# Altium PCB MCU098_MSPM0G3507_PCB.PcbDoc (part 2 of 5)
Units mil, origin at the board's own origin, x right, y up, seen from the top; angles counter-clockwise.
Board outline 2310.03 x 4205.03 mil, 4 copper layers (Top Layer, VCC Layer, GND Layer, Bottom Layer), stack 62.4 mil thick; 260 components, 182 nets, 835 pads, 237 vias.
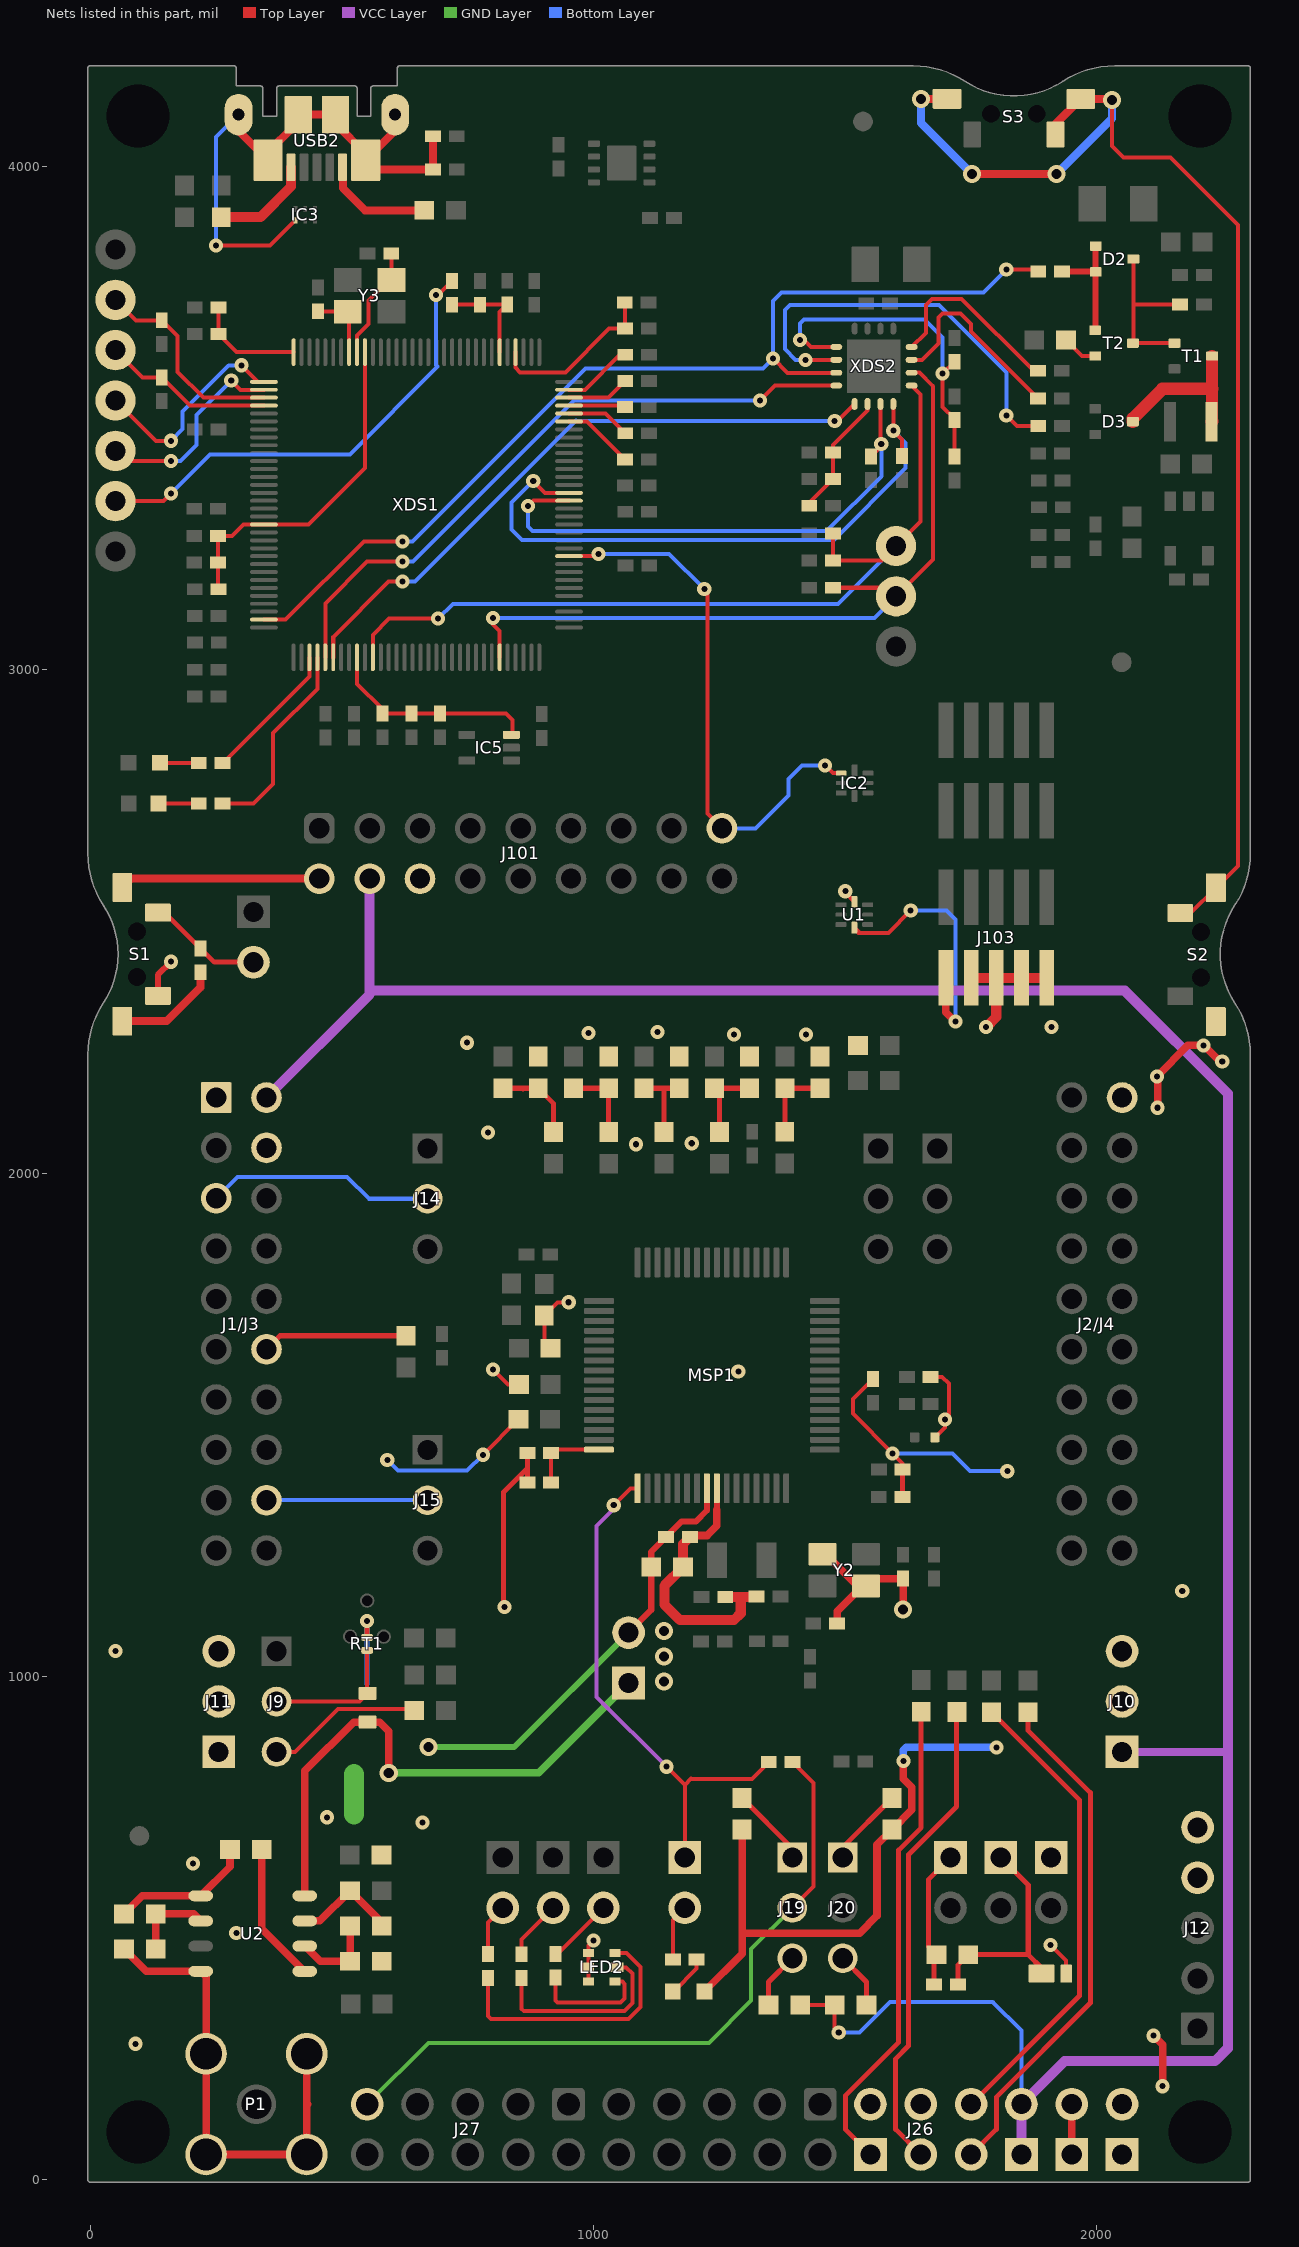
[diagram p4: the nets of this part, all layers, seen from the top]

## Part data
C1: library part CMP-0007304-1, "CAP, CERM, 10 uF, 6.3 V, +/- 20%, X5R, 0603", Cap_Case=0603, Manufacturer=MuRata, Supplier Part Number 1=490-7316-1-ND, TempCo=X5R, Tolerance_%=20%, Value1=Unknown, Value2=6.3V, ValueDisplayed=10uF, AEC Category=Q200, AEC Qualified=?, Cap_F=10µF, ComponentLink1Description="Datasheet link", ComponentLink1URL=http://search.murata.co.jp/Ceramy/image/img/A01X/G101/ENG/GRM188R60J106ME84-01.pdf, CompType=Capacitor, LatestRevisionDate=2017-03-09, MountType=SMT, PackageReference=0603, PartNumber=GRM188R60J106ME84, Polarized=N, Published=2008-06-19, Publisher="Texas Instruments", RoHS=Y, SizeArea_mm2=1.28, SizeAreaWB_mm2=4.68, SizeX_mm=1.6, SizeY_mm=0.8, SizeZ_mm=1, Supplier 1=Digi-Key, TaMax_C=85°C, TaMin_C=-55°C, Technology=Ceramic, U/M=EA, VDC_V=6.3V
C2: library part CMP-0006614-2, "CAP, CERM, 0.1 uF, 50 V, +/- 20%, X5R, 0402", Cap_Case=0402, Manufacturer=MuRata, Supplier Part Number 1=GRM155R61H104ME14D-ND, TempCo=X5R, Tolerance_%=20%, Value1=Unknown, Value2=50V, ValueDisplayed=0.1uF, AEC Category=Q200, AEC Grade=N/A, AEC Qualified=N, Cap_F=100nF, ComponentLink1Description="Datasheet link", ComponentLink1URL=http://search.murata.co.jp/Ceramy/image/img/A01X/G101/ENG/GRM155R61H104ME14-01.pdf, CompType=Capacitor, LatestRevisionDate=2017-03-09, MountType=SMT, PackageReference=0402, PartNumber=GRM155R61H104ME14D, Polarized=N, Published=2008-06-19, Publisher="Texas Instruments", RoHS=Y, SizeArea_mm2=0.5, SizeAreaWB_mm2=3, SizeX_mm=1, SizeY_mm=0.5, SizeZ_mm=0.6, Supplier 1=Digi-Key, Supplier 2=Mouser, Supplier Part Number 2=81-GRM155R61H104ME4D, TaMax_C=85°C, TaMin_C=-55°C, Technology=Ceramic, U/M=EA, VDC_V=50V
C3: library part CMP-0006551-2, "CAP, CERM, 0.47 uF, 6.3 V, +/- 10%, X5R, 0402", Cap_Case=0402, Manufacturer=MuRata, Supplier Part Number 1=490-3266-1-ND, TempCo=X5R, Tolerance_%=10%, Value1=Unknown, Value2=6.3V, ValueDisplayed=0.47uF, AEC Category=Q200, AEC Qualified=?, Cap_F=470nF, ComponentLink1Description="Datasheet link", ComponentLink1URL=http://search.murata.co.jp/Ceramy/PnsearchViewAction.do?HnOFG=ON&HnNFG=ON&SEL_CNT=50&sLang=en&sKey=GRM155R60J474KE19D&x=9&y=9&search=startwith, CompType=Capacitor, LatestRevisionDate=2017-03-09, MountType=SMT, PackageReference=0402, PartNumber=GRM155R60J474KE19D, Polarized=N, Published=2008-06-19, Publisher="Texas Instruments", RoHS=Y, SizeArea_mm2=0.5, SizeAreaWB_mm2=3, SizeX_mm=1, SizeY_mm=0.5, SizeZ_mm=0.6, Supplier 1=Digi-Key, Supplier 2=Newark, Supplier 3=Mouser, Supplier Part Number 2=38K1645, Supplier Part Number 3=81-GRM155R60J474KE9D, TaMax_C=85°C, TaMin_C=-55°C, Technology=Ceramic, U/M=EA, VDC_V=6.3V
C4: library part CMP-0006614-2, "CAP, CERM, 0.1 uF, 50 V, +/- 20%, X5R, 0402", Cap_Case=0402, Manufacturer=MuRata, Supplier Part Number 1=GRM155R61H104ME14D-ND, TempCo=X5R, Tolerance_%=20%, Value1=Unknown, Value2=50V, ValueDisplayed=DNC, AEC Category=Q200, AEC Grade=N/A, AEC Qualified=N, Cap_F=100nF, ComponentLink1Description="Datasheet link", ComponentLink1URL=http://search.murata.co.jp/Ceramy/image/img/A01X/G101/ENG/GRM155R61H104ME14-01.pdf, CompType=Capacitor, LatestRevisionDate=2017-03-09, MountType=SMT, PackageReference=0402, PartNumber=GRM155R61H104ME14D, Polarized=N, Published=2008-06-19, Publisher="Texas Instruments", RoHS=Y, SizeArea_mm2=0.5, SizeAreaWB_mm2=3, SizeX_mm=1, SizeY_mm=0.5, SizeZ_mm=0.6, Supplier 1=Digi-Key, Supplier 2=Mouser, Supplier Part Number 2=81-GRM155R61H104ME4D, TaMax_C=85°C, TaMin_C=-55°C, Technology=Ceramic, U/M=EA, VDC_V=50V
C5: library part CMP-0006388-2, "CAP, CERM, 47 pF, 25 V, +/- 5%, C0G/NP0, 0402", Cap_Case=0402, Manufacturer=MuRata, Supplier Part Number 1=81-GRM1555C1E470JA1D, TempCo=C0G/NP0, Tolerance_%=5%, Value1=Unknown, Value2=25V, ValueDisplayed=47pF, AEC Category=Q200, AEC Qualified=?, Cap_F=47pF, ComponentLink1Description="Datasheet link", ComponentLink1URL=http://search.murata.co.jp/Ceramy/PnsearchViewAction.do?HnOFG=ON&HnNFG=ON&SEL_CNT=50&sLang=en&sKey=GRM1555C1E470JA01D&x=9&y=9&search=startwith, CompType=Capacitor, LatestRevisionDate=2017-03-09, MountType=SMT, PackageReference=0402, PartNumber=GRM1555C1E470JA01D, Polarized=N, Published=2008-06-19, Publisher="Texas Instruments", RoHS=Y, SizeArea_mm2=0.5, SizeAreaWB_mm2=3, SizeX_mm=1, SizeY_mm=0.5, SizeZ_mm=0.6, Supplier 1=Mouser, TaMax_C=125°C, TaMin_C=-55°C, Technology=Ceramic, U/M=EA, VDC_V=25V
C6: library part CMP-0006590-2, "CAP, CERM, 0.01 uF, 16 V, +/- 10%, X5R, 0402", Cap_Case=0402, Manufacturer=MuRata, Supplier Part Number 1=GRM155R61C103KA01D-ND, TempCo=X5R, Tolerance_%=10%, Value1=Unknown, Value2=16V, ValueDisplayed=0.01uF, AEC Category=Q200, AEC Qualified=?, Cap_F=10nF, ComponentLink1Description="Datasheet link", ComponentLink1URL=http://search.murata.co.jp/Ceramy/PnsearchViewAction.do?HnOFG=ON&HnNFG=ON&SEL_CNT=50&sLang=en&sKey=GRM155R61C103KA01D&x=9&y=9&search=startwith, CompType=Capacitor, LatestRevisionDate=2017-03-09, MountType=SMT, PackageReference=0402, PartNumber=GRM155R61C103KA01D, Polarized=N, Published=2008-06-19, Publisher="Texas Instruments", RoHS=Y, SizeArea_mm2=0.5, SizeAreaWB_mm2=3, SizeX_mm=1, SizeY_mm=0.5, SizeZ_mm=0.6, Supplier 1=Digi-Key, Supplier 2=Mouser, Supplier Part Number 2=81-GRM155R61C103KA1D, TaMax_C=85°C, TaMin_C=-55°C, Technology=Ceramic, U/M=EA, VDC_V=16V
C7 C8: library part CMP-0007006-5, "CAP, CERM, 1 uF, 25 V, +/- 10%, X5R, 0603", Cap_Case=0603, Manufacturer=TDK, Supplier Part Number 1=445-5146-1-ND, TempCo=X5R, Tolerance_%=10%, Value1=Unknown, Value2=25V, ValueDisplayed=DNC, AEC Category=Q200, AEC Grade=N/A, AEC Qualified=N, Cap_F=1µF, ComponentLink1Description="Datasheet link", ComponentLink1URL=https://product.tdk.com/info/en/catalog/datasheets/mlcc_commercial_general_en.pdf, CompType=Capacitor, LatestRevisionDate=2017-03-09, MountType=SMT, PackageReference=0603, PartNumber=C1608X5R1E105K080AC, Polarized=N, Published=2008-06-19, Publisher="Texas Instruments", RoHS=Y, SizeArea_mm2=1.28, SizeAreaWB_mm2=4.68, SizeX_mm=1.6, SizeY_mm=0.8, SizeZ_mm=1, Supplier 1=Digi-Key, Supplier 2=Newark, Supplier 3=Mouser, Supplier Part Number 2=90R7677, Supplier Part Number 3=810-C1608X5R1E105K, TaMax_C=85°C, TaMin_C=-55°C, Technology=Ceramic, U/M=EA, VDC_V=25V
C9 C10 C11 C12: library part CMP-0006439-2, "CAP, CERM, 22 pF, 50 V, +/- 5%, C0G/NP0, 0402", Cap_Case=0402, Manufacturer=MuRata, Supplier Part Number 1=81-GRM1555C1H220JA1D, TempCo=C0G/NP0, Tolerance_%=5%, Value1=Unknown, Value2=50V, ValueDisplayed=22pF, AEC Category=Q200, AEC Qualified=?, Cap_F=22pF, ComponentLink1Description="Datasheet link", ComponentLink1URL=http://search.murata.co.jp/Ceramy/PnsearchViewAction.do?HnOFG=ON&HnNFG=ON&SEL_CNT=50&sLang=en&sKey=GRM1555C1H220JA01D&x=9&y=9&search=startwith, CompType=Capacitor, LatestRevisionDate=2017-03-09, MountType=SMT, PackageReference=0402, PartNumber=GRM1555C1H220JA01D, Polarized=N, Published=2008-06-19, Publisher="Texas Instruments", RoHS=Y, SizeArea_mm2=0.5, SizeAreaWB_mm2=3, SizeX_mm=1, SizeY_mm=0.5, SizeZ_mm=0.6, Supplier 1=Mouser, TaMax_C=125°C, TaMin_C=-55°C, Technology=Ceramic, U/M=EA
C13 C17 C18 C20 C24 C27 C28 C33 C38 C39 C44: library part CMP-0006623-2, "CAP, CERM, 0.1 uF, 6.3 V, +/- 10%, X7R, 0402", Cap_Case=0402, Manufacturer=MuRata, Supplier Part Number 1=GRM155R70J104KA01D-ND, TempCo=X7R, Tolerance_%=10%, Value1=Unknown, Value2=6.3V, ValueDisplayed=0.1uF, AEC Category=Q200, AEC Qualified=?, Cap_F=100nF, ComponentLink1Description="Datasheet link", ComponentLink1URL=http://search.murata.co.jp/Ceramy/PnsearchViewAction.do?HnOFG=ON&HnNFG=ON&SEL_CNT=50&sLang=en&sKey=GRM155R70J104KA01D&x=9&y=9&search=startwith, CompType=Capacitor, LatestRevisionDate=2017-03-09, MountType=SMT, PackageReference=0402, PartNumber=GRM155R70J104KA01D, Polarized=N, Published=2008-06-19, Publisher="Texas Instruments", RoHS=Y, SizeArea_mm2=0.5, SizeAreaWB_mm2=3, SizeX_mm=1, SizeY_mm=0.5, SizeZ_mm=0.6, Supplier 1=Digi-Key, Supplier 2=Mouser, Supplier Part Number 2=81-GRM155R70J104KA1D, TaMax_C=125°C, TaMin_C=-55°C, Technology=Ceramic, U/M=EA, VDC_V=6.3V
C14 C15 C16 C22 C26: library part CMP-0006658-2, "CAP, CERM, 0.01 uF, 25 V, +/- 10%, X7R, 0402", Cap_Case=0402, Manufacturer=MuRata, Supplier Part Number 1=490-1312-1-ND, TempCo=X7R, Tolerance_%=10%, Value1=Unknown, Value2=25V, ValueDisplayed=0.01uF, AEC Category=Q200, AEC Qualified=?, Cap_F=10nF, ComponentLink1Description="Datasheet link", ComponentLink1URL=http://search.murata.co.jp/Ceramy/PnsearchViewAction.do?HnOFG=ON&HnNFG=ON&SEL_CNT=50&sLang=en&sKey=GRM155R71E103KA01D&x=9&y=9&search=startwith, CompType=Capacitor, LatestRevisionDate=2017-03-09, MountType=SMT, PackageReference=0402, PartNumber=GRM155R71E103KA01D, Polarized=N, Published=2008-06-19, Publisher="Texas Instruments", RoHS=Y, SizeArea_mm2=0.5, SizeAreaWB_mm2=3, SizeX_mm=1, SizeY_mm=0.5, SizeZ_mm=0.6, Supplier 1=Digi-Key, Supplier 2=Mouser, Supplier 3=Farnell, Supplier Part Number 2=81-GRM36X103K25, Supplier Part Number 3=8819734, TaMax_C=125°C, TaMin_C=-55°C, Technology=Ceramic, U/M=EA, VDC_V=25V
C19 C21 C25 C55: library part CMP-0006276-2, "CAP, CERM, 1 uF, 25 V, +/- 10%, X5R, 0402", Cap_Case=0402, Manufacturer=TDK, Supplier Part Number 1=445-9066-1-ND, TempCo=X5R, Tolerance_%=10%, Value1=Unknown, Value2=25V, ValueDisplayed=1uF, AEC Category=Q200, AEC Grade=N/A, AEC Qualified=N, Cap_F=1µF, ComponentLink1Description="Datasheet link", ComponentLink1URL=https://product.tdk.com/info/en/catalog/datasheets/mlcc_commercial_general_en.pdf, CompType=Capacitor, LatestRevisionDate=2017-03-09, MountType=SMT, PackageReference=0402, PartNumber=C1005X5R1E105K050BC, Polarized=N, Published=2008-06-19, Publisher="Texas Instruments", RoHS=Y, SizeArea_mm2=0.5, SizeAreaWB_mm2=3, SizeX_mm=1, SizeY_mm=0.5, SizeZ_mm=0.6, Supplier 1=Digi-Key, Supplier 2=Newark, Supplier 3=Mouser, Supplier Part Number 2=07W9127, Supplier Part Number 3=810-C1005X5R1E105K, TaMax_C=80°C, TaMin_C=-55°C, Technology=Ceramic, U/M=EA, VDC_V=25V
C23 C56: library part CMP-0006543-2, "CAP, CERM, 2.2 uF, 6.3 V, +/- 10%, X5R, 0402", Cap_Case=0402, Manufacturer=MuRata, Supplier Part Number 1=81-GRM155R60J225KE5D, TempCo=X5R, Tolerance_%=10%, Value1=Unknown, Value2=6.3V, ValueDisplayed=2.2uF, AEC Category=Q200, AEC Grade=N/A, AEC Qualified=N, Cap_F=2.2µF, ComponentLink1Description="Datasheet link", ComponentLink1URL=http://psearch.en.murata.com/capacitor/product/GRM155R60J225KE95%23.pdf, CompType=Capacitor, LatestRevisionDate=2017-03-09, MountType=SMT, PackageReference=0402, PartNumber=GRM155R60J225KE95D, Polarized=N, Published=2008-06-19, Publisher="Texas Instruments", RoHS=Y, SizeArea_mm2=0.5, SizeAreaWB_mm2=3, SizeX_mm=1, SizeY_mm=0.5, SizeZ_mm=0.6, Supplier 1=Mouser, TaMax_C=85°C, TaMin_C=-55°C, Technology=Ceramic, U/M=EA, VDC_V=6.3V
C29 C30: library part CMP-0006415-2, "CAP, CERM, 12 pF, 50 V, +/- 5%, C0G/NP0, 0402", Cap_Case=0402, Manufacturer=MuRata, Supplier Part Number 1=14T3292, TempCo=C0G/NP0, Tolerance_%=5%, Value1=Unknown, Value2=50V, ValueDisplayed=12pF, AEC Category=Q200, AEC Qualified=?, Cap_F=12pF, ComponentLink1Description="Datasheet link", ComponentLink1URL=http://search.murata.co.jp/Ceramy/PnsearchViewAction.do?HnOFG=ON&HnNFG=ON&SEL_CNT=50&sLang=en&sKey=GRM1555C1H120JA01D&x=9&y=9&search=startwith, CompType=Capacitor, LatestRevisionDate=2017-03-09, MountType=SMT, PackageReference=0402, PartNumber=GRM1555C1H120JA01D, Polarized=N, Published=2008-06-19, Publisher="Texas Instruments", RoHS=Y, SizeArea_mm2=0.5, SizeAreaWB_mm2=3, SizeX_mm=1, SizeY_mm=0.5, SizeZ_mm=0.6, Supplier 1=Newark, Supplier 2=Mouser, Supplier 3=Farnell, Supplier Part Number 2=81-GRM1555C1H120JA1D, Supplier Part Number 3=1828875, TaMax_C=125°C, TaMin_C=-55°C, Technology=Ceramic, U/M=EA, VDC_V=50V
C31 C34: library part CMP-0006454-1, "CAP, CERM, 33 pF, 50 V, +/- 5%, C0G/NP0, 0402", Cap_Case=0402, Manufacturer=MuRata, Supplier Part Number 1=81-GRM1555C1H330JA1D, TempCo=C0G/NP0, Tolerance_%=5%, Value1=Unknown, Value2=50V, ValueDisplayed=33pF, AEC Category=Q200, AEC Qualified=?, Cap_F=33pF, ComponentLink1Description="Datasheet link", ComponentLink1URL=http://search.murata.co.jp/Ceramy/PnsearchViewAction.do?HnOFG=ON&HnNFG=ON&SEL_CNT=50&sLang=en&sKey=GRM1555C1H330JA01D&x=9&y=9&search=startwith, CompType=Capacitor, LatestRevisionDate=2017-03-09, MountType=SMT, PackageReference=0402, PartNumber=GRM1555C1H330JA01D, Polarized=N, Published=2008-06-19, Publisher="Texas Instruments", RoHS=Y, SizeArea_mm2=0.5, SizeAreaWB_mm2=3, SizeX_mm=1, SizeY_mm=0.5, SizeZ_mm=0.6, Supplier 1=Mouser, TaMax_C=125°C, TaMin_C=-55°C, Technology=Ceramic, U/M=EA, VDC_V=50V
C32 C36: library part CMP-0011480-1, "CAP, TA, 4.7 uF, 16 V, +/- 10%, 4 ohm, SMD", Cap_Case=3216-18, Manufacturer=AVX, Supplier Part Number 1=478-3868-1-ND, Tolerance_%=10%, Value1="4 ohm", Value2=16V, ValueDisplayed=4.7uF, AEC Category=Q200, AEC Grade=N/A, AEC Qualified=N, Cap_F=4.7µF, ComponentLink1Description="Datasheet link", ComponentLink1URL=http://www.avx.com/docs/Catalogs/taj.pdf, CompType=Capacitor, ESR_ohm=4, LatestRevisionDate=2017-03-09, LatestRevisionNote="Updated supplier links", MountType=SMT, PackageReference=3216-18, PartNumber=TAJA475K016RNJ, Polarized=Y, Publisher="Texas Instruments", RoHS=Y, Series=TAJ, SizeArea_mm2=5.12, SizeAreaWB_mm2=10.92, SizeX_mm=3.2, SizeY_mm=1.6, SizeZ_mm=1.8, Supplier 1=Digi-Key, Supplier 2=Newark, Supplier 3=Mouser, Supplier Part Number 2=60R5857, Supplier Part Number 3=581-TAJA475K016R, TaMax_C=125°C, TaMin_C=-55°C, Technology=TA, U/M=EA, VDC_V=16V
C35: library part CMP-0006354-2, "CAP, CERM, 1000 pF, 50 V, +/- 10%, X7R, AEC-Q200 Grade 1, 0402", Cap_Case=0402, Manufacturer=MuRata, Supplier Part Number 1=490-4761-1-ND, TempCo=X7R, Tolerance_%=10%, Value1=Unknown, Value2=50V, ValueDisplayed=1000pF, AEC Category=Q200, AEC Grade=1, AEC Qualified=Y, Cap_F=1nF, ComponentLink1Description="Datasheet link", ComponentLink1URL=http://psearch.en.murata.com/capacitor/product/GCM155R71H102KA37%23.pdf, CompType=Capacitor, LatestRevisionDate=2017-03-09, MountType=SMT, PackageReference=0402, PartNumber=GCM155R71H102KA37D, Polarized=N, Published=2008-06-19, Publisher="Texas Instruments", RoHS=Y, SizeArea_mm2=0.5, SizeAreaWB_mm2=3, SizeX_mm=1, SizeY_mm=0.5, SizeZ_mm=0.6, Supplier 1=Digi-Key, Supplier 2=Newark, Supplier 3=Mouser, Supplier Part Number 2=45Y5158, Supplier Part Number 3=81-GCM155R71H102KA7D, TaMax_C=125°C, TaMin_C=-55°C, Technology=Ceramic, U/M=EA, VDC_V=50V
C37 C43: library part CMP-0007341-4, "CAP, CERM, 4.7 uF, 16 V, +/- 10%, X5R, 0603", Cap_Case=0603, Manufacturer=MuRata, Supplier Part Number 1=490-10481-1-ND, TempCo=X5R, Tolerance_%=10%, Value1=Unknown, Value2=16V, ValueDisplayed=4.7uF, AEC Category=Q200, AEC Grade=N/A, AEC Qualified=N, Cap_F=4.7µF, ComponentLink1Description="Datasheet link", ComponentLink1URL=http://psearch.murata.com/capacitor/product/GRM188R61C475KAAJ%23.pdf, CompType=Capacitor, LatestRevisionDate=2017-03-09, MountType=SMT, PackageReference=0603, PartNumber=GRM188R61C475KAAJ, Polarized=N, Published=2008-06-19, Publisher="Texas Instruments", RoHS=Y, SizeArea_mm2=1.28, SizeAreaWB_mm2=4.68, SizeX_mm=1.6, SizeY_mm=0.8, SizeZ_mm=1, Supplier 1=Digi-Key, Supplier 2=Mouser, Supplier Part Number 2=81-GRM188R61C475KAJD, TaMax_C=85°C, TaMin_C=-55°C, Technology=Ceramic, U/M=EA, VDC_V=16V
C40: library part CMP-0007313-1, "CAP, CERM, 47 uF, 6.3 V, +/- 20%, X5R, 0603", Cap_Case=0603, Manufacturer=MuRata, TempCo=X5R, Tolerance_%=20%, Value1=Unknown, Value2=6.3V, ValueDisplayed=47uF, AEC Category=Q200, AEC Qualified=?, Cap_F=47µF, ComponentLink1Description="Datasheet link", ComponentLink1URL=http://psearch.en.murata.com/capacitor/product/GRM188R60J476ME15%23.pdf, CompType=Capacitor, LatestRevisionDate=2017-03-09, MountType=SMT, PackageReference=0603, PartNumber=GRM188R60J476ME15D, Polarized=N, Published=2008-06-19, Publisher="Texas Instruments", RoHS=Y, SizeArea_mm2=1.28, SizeAreaWB_mm2=4.68, SizeX_mm=1.6, SizeY_mm=0.8, SizeZ_mm=1, TaMax_C=85°C, TaMin_C=-55°C, Technology=Ceramic, U/M=EA, VDC_V=6.3V
C41 C42: library part CMP-0006648-1, "CAP, CERM, 0.22 uF, 16 V, +/- 10%, X7R, 0402", Cap_Case=0402, Manufacturer=MuRata, Supplier Part Number 1=490-5418-1-ND, TempCo=X7R, Tolerance_%=10%, Value1=Unknown, Value2=16V, ValueDisplayed=0.22uF, AEC Category=Q200, AEC Qualified=?, Cap_F=220nF, ComponentLink1Description="Datasheet link", ComponentLink1URL=http://search.murata.co.jp/Ceramy/PnsearchViewAction.do?HnOFG=ON&HnNFG=ON&SEL_CNT=50&sLang=en&sKey=GRM155R71C224KA12D&x=9&y=9&search=startwith, CompType=Capacitor, LatestRevisionDate=2017-03-09, MountType=SMT, PackageReference=0402, PartNumber=GRM155R71C224KA12D, Polarized=N, Published=2008-06-19, Publisher="Texas Instruments", RoHS=Y, SizeArea_mm2=0.5, SizeAreaWB_mm2=3, SizeX_mm=1, SizeY_mm=0.5, SizeZ_mm=0.6, Supplier 1=Digi-Key, Supplier 2=Mouser, Supplier Part Number 2=81-GRM155R71C224KA2D, TaMax_C=125°C, TaMin_C=-55°C, Technology=Ceramic, U/M=EA, VDC_V=16V
C45 C46 C48 C49 C50 C51 C52 C53: library part CMP-0006906-5, "CAP, CERM, 2.2 uF, 10 V, +/- 10%, X5R, 0603", Cap_Case=0603, Manufacturer=Kemet, Supplier Part Number 1=399-4911-1-ND, TempCo=X5R, Tolerance_%=10%, Value1=Unknown, Value2=10V, ValueDisplayed=2.2uF, AEC Category=Q200, AEC Qualified=?, Cap_F=2.2µF, ComponentLink1Description="Datasheet link", ComponentLink1URL=http://www.kemet.com/kemet/web/homepage/kechome.nsf/vapubfiles/F3102_Y5V.pdf/$file/F3102_Y5V.pdf, CompType=Capacitor, LatestRevisionDate=2017-03-09, MountType=SMT, PackageReference=0603, PartNumber=C0603C225K8PACTU, Polarized=N, Published=2008-06-19, Publisher="Texas Instruments", RoHS=Y, SizeArea_mm2=1.28, SizeAreaWB_mm2=4.68, SizeX_mm=1.6, SizeY_mm=0.8, SizeZ_mm=1, Supplier 1=Digi-Key, Supplier 2=Mouser, Supplier 3=Farnell, Supplier Part Number 2=80-C0603C225K8P, Supplier Part Number 3=1108322, TaMax_C=85°C, TaMin_C=-55°C, Technology=Ceramic, U/M=EA, VDC_V=10V
C47: library part CMP-0006970-1, "CAP, CERM, 82 pF, 50 V, +/- 10%, C0G/NP0, 0603", Cap_Case=0603, Manufacturer=Kemet, Supplier Part Number 1=399-1059-1-ND, TempCo=C0G/NP0, Tolerance_%=10%, Value1=Unknown, Value2=50V, ValueDisplayed=82pF, AEC Category=Q200, AEC Qualified=?, Cap_F=82pF, ComponentLink1Description="Datasheet link", ComponentLink1URL=http://www.kemet.com/kemet/web/homepage/kechome.nsf/vapubfiles/F3102_Y5V.pdf/$file/F3102_Y5V.pdf, CompType=Capacitor, LatestRevisionDate=2017-03-09, MountType=SMT, PackageReference=0603, PartNumber=C0603C820K5GACTU, Polarized=N, Published=2008-06-19, Publisher="Texas Instruments", RoHS=Y, SizeArea_mm2=1.28, SizeAreaWB_mm2=4.68, SizeX_mm=1.6, SizeY_mm=0.8, SizeZ_mm=1, Supplier 1=Digi-Key, Supplier 2=Mouser, Supplier Part Number 2=80-C0603C820K5G, TaMax_C=125°C, TaMin_C=-55°C, Technology=Ceramic, U/M=EA, VDC_V=50V
C54: library part CMP-0006688-2, "CAP, CERM, 3300 pF, 50 V, +/- 10%, X7R, 0402", Cap_Case=0402, Manufacturer=MuRata, Supplier Part Number 1=490-3248-1-ND, TempCo=X7R, Tolerance_%=10%, Value1=Unknown, Value2=50V, ValueDisplayed=3300pF, AEC Category=Q200, AEC Qualified=?, Cap_F=3.3nF, ComponentLink1Description="Datasheet link", ComponentLink1URL=http://search.murata.co.jp/Ceramy/PnsearchViewAction.do?HnOFG=ON&HnNFG=ON&SEL_CNT=50&sLang=en&sKey=GRM155R71H332KA01D&x=9&y=9&search=startwith, CompType=Capacitor, LatestRevisionDate=2017-03-09, MountType=SMT, PackageReference=0402, PartNumber=GRM155R71H332KA01D, Polarized=N, Published=2008-06-19, Publisher="Texas Instruments", RoHS=Y, SizeArea_mm2=0.5, SizeAreaWB_mm2=3, SizeX_mm=1, SizeY_mm=0.5, SizeZ_mm=0.6, Supplier 1=Digi-Key, Supplier 2=Mouser, Supplier Part Number 2=81-GRM36X332K50, TaMax_C=125°C, TaMin_C=-55°C, Technology=Ceramic, U/M=EA, VDC_V=50V
D1: library part CMP-0093192-1, "Photodiode PIN Chip 910nm Automotive 2-Pin Case 0805(2012Metric) T/R", Dark Current=0.001uA, Digikey Part Number=751-VEMD4110X01CT-ND, Forward Current=50mA, Manufacturer=Vishay, Mouser Part Number=78-VEMD4110X01, Operating Temperature Range="-40°C to +110°C", Reverse Breakdown Voltage=20V, AEC Grade="Grade 2", AEC Qualified=Yes, Angle=110°, ComponentLink1Description=Datasheet, ComponentLink1URL=https://www.vishay.com/docs/84910/vemd4110x01.pdf, datasheet=https://www.vishay.com/docs/84910/vemd4110x01.pdf, Datasheet Path=datasheets/Diode-VEMD4110X01.pdf, Digikey Description="PHOTO PIN DIODE IN LOW PROFILE 0", helpURL=https://upverter.com/upn/revision/01c27b98662013f0/, LambdaD=910nm, Lead Free=Yes, PackageReference=0805, Part Number=VEMD4110X01, PartNumber=VEMD4110X01, RoHS=TRUE, Sensor Output=Photodiode, SizeZ_mm=0.8mm, TaMax_C=+110°C, TaMin_C=-40°C, Vf_V=1.1V
D2 D3: library part CMP-0028883-1, "Diode, Schottky, 40 V, 0.12 A, AEC-Q101, SOT-323", Manufacturer=Nexperia, Supplier Part Number 1=568-7982-1-ND, Value1=0.12A, Value2=1V, AEC Category=Q101, AEC Qualified=Y, ComponentLink1Description="Datasheet link", ComponentLink1URL=http://www.nexperia.com/documents/data_sheet/BAS40_1PSXXSB4X_SER.pdf, CompType=Diode, Green_EU RoHS=Incomplete, Green_EU RoHS-2=Incomplete, Green_Lifecycle="Not Set", Green_REACh=Incomplete, Io_A=120mA, LatestRevisionDate=2017-05-08, MountType=SMT, PackageReference=SOT-323, PartNumber=BAS40-05W,115, Published=2008-06-26, Publisher="Texas Instruments", RoHS=Y, SizeArea_mm2=4.84, SizeAreaWB_mm2=10.24, SizeX_mm=2.2, SizeY_mm=2.2, SizeZ_mm=1.1, Supplier 1=Digi-Key, Supplier 2=Newark, Supplier 3=Mouser, Supplier Part Number 2=70R1987, Supplier Part Number 3=771-BAS40-05W115, TJmax_C=150°C, Type=Schottky, U/M=EA, Vf_V=1V, Vr_V=40V
FID1 FID2 FID3: library part CMP-0077181-1, "Fiducial mark.  There is nothing to buy or mount.", Manufacturer=N/A, ClassName=FiducialMark, CompType=Fiducial, MountType=N/A, PackageReference=N/A, PartNumber=N/A
H1 H2: library part CMP-0077978-1, "Spacer Support, Nylon 66", Manufacturer="Kang Yang", ComponentLink1Description="Datasheet Link", ComponentLink1URL=https://sps16.itg.ti.com/sites/KMS/crossdivteams/altium/docs/ComponentDatasheets/1104004000018---MAE-10.pdf, CompType=Standoff, Key=MAE-10, MountType=N/A, PackageReference="Spacer Nylon Support", PartNumber=MAE-10, RoHS=Y
IC1: library part CMP-0074212-1, "2.7-4V Dual In/Single Out MOSFET, 0.5A Main/0.1A Aux Input, Act-Low Enable, Comm. Temp., DBV0005A (SOT-23-5)", Alternate Manufacturer="Texas Instruments", Alternate PartNumber=TPS2102DBVT, ComponentLink1Description="Datasheet Link", ComponentLink1URL=http://www.ti.com/lit/ds/symlink/tps2102.pdf, CompType=IC, Footprint Path 6=C:\AltiumLibraries\Footprints\TI\.PcbLib, LatestRevisionDate=2017-06-09, Manufacturer="Texas Instruments", MountType=SMT, PackageDescription=SOT-23-5, PackageReference=DBV0005A, PartNumber=TPS2102DBVR, Publisher="Texas Instruments", RoHS=Y, SizeArea_mm2=8.12, SizeAreaWB_mm2=14.82, SizeX_mm=2.8, SizeY_mm=2.9, SizeZ_mm=1.45, U/M=EA
IC2 U1: library part CMP-0043125-2, "Low-Capacitance + / - 15 kV ESD Protection Array for High-Speed Data Interfaces, 6 Channels, -40 to +85 degC, 8-pin UQFN (RSE), Green (RoHS & no Sb/Br)", Breakdown Voltage(Min)(V)=6, IO Capacitance(Typ)(pF)=1.6, IO Leakage Current(nA)=1, Manufacturer="Texas Instruments", 1394 / Firewire=TRUE, ComponentLink1Description="Manufacturer URL", ComponentLink1URL=http://www.ti.com/, ComponentLink2Description=Datasheet, ComponentLink2URL=http://www.ti.com/general/docs/lit/getliterature.tsp?genericPartNumber=TPD6E004&fileType=pdf, ComponentLink3Description="URL Link1", ComponentLink3URL=SamplesURL:http://www.ti.com/product/tpd6e004#samples, DatasheetVersion=SLLS799A, Eco-Plan="Green (RoHS & no Sb/Br)", IEC 61000-4-2 Air-Gap(+/- kV)=12, IEC 61000-4-2 Contact(+/- kV)=8, Mounting Technology="Surface Mount", PackageDescription="8-Pin Plastic Quad Flatpack No-Lead, 1.5 x 1.5 mm Body, 0.5 mm Pitch", PackageReference=RSE0008A, PackageVersion="revD, Jan-2011", PartNumber=TPD6E004RSER, Serial ATA / eSATA=TRUE, SubFamily="ESD Solution", USB High Speed=TRUE
IC3: library part CMP-0043115-1, "ESD-Protection Array for High-Speed Data Interfaces, 4 Channels, -40 to +85 degC, 6-pin SON (DRY), Green (RoHS & no Sb/Br)", Breakdown Voltage(Min)(V)=6, IO Capacitance(Typ)(pF)=1.6, IO Leakage Current(nA)=1, Manufacturer="Texas Instruments", 1394 / Firewire=TRUE, ComponentLink1Description="Manufacturer URL", ComponentLink1URL=http://www.ti.com/, ComponentLink2Description=Datasheet, ComponentLink2URL=http://www.ti.com/general/docs/lit/getliterature.tsp?genericPartNumber=TPD4E004&fileType=pdf, ComponentLink3Description="URL Link1", ComponentLink3URL=SamplesURL:http://www.ti.com/product/tpd4e004#samples, DatasheetVersion=SLVS729A, Eco-Plan="Green (RoHS & no Sb/Br)", IEC 61000-4-2 Air-Gap(+/- kV)=12, IEC 61000-4-2 Contact(+/- kV)=8, Mounting Technology="Surface Mount", PackageDescription="6-Pin Plastic Small Outline No-Lead, 1 x 1.45 x 0.6 mm Body, 0.5 mm Pitch", PackageReference=DRY0006A, PackageVersion="revF, Dec-2011", PartNumber=TPD4E004DRYR, Serial ATA / eSATA=TRUE, SubFamily="ESD Solution", USB High Speed=TRUE
IC4: library part CMP-0036329-3, "500mA, Adjustable, Low Quiescent Current, Low-Noise, High-PSRR, Single-Output LDO Regulator, DRB0008A (VSON-8)", Manufacturer="Texas Instruments", Operating Temperature Range="-40 to 125 C", Rating=Catalog, Accuracy(%)=2, AEC Category=Q200, AEC Qualified=N, ComponentLink1Description="Datasheet Link", ComponentLink1URL=http://www.ti.com/lit/ds/symlink/tps735.pdf, ComponentLink2Description="Product Folder", ComponentLink2URL=http://www.ti.com/product/tps735, ComponentLink3Description="Online Datasheet", ComponentLink3URL=http://www.ti.com/product/tps735/datasheet, CompType=IC, Fixed Output Options(V)=3.3, Iout(Max)(A)=0.5, Iq(Typ)(mA)=0.04, MountType=SMT, PackageDescription=VSON-8, PackageReference=DRB0008A, PartNumber=TPS73533DRBT, RoHS=Y, SizeArea_mm2=9.0, SizeAreaWB_mm2=16.0, SizeX_mm=3.0, SizeY_mm=3.0, SizeZ_mm=1.0, Vdo(Typ)(mV)=280, Vin(Max)(V)=6.5, Vin(Min)(V)=2.7, Vout Adj(Max)(V)=3.3, Vout Adj(Min)(V)=3.3
IC5: library part CMP-0032790-2, "Precision Micropower Shunt Voltage Reference, 0.5% accuracy, 2.5 V, 15 ppm / degC, 15 mA, -40 to 85 degC, 5-pin SC70 (DCK), Green (RoHS & no Sb/Br)", Manufacturer="Texas Instruments", Rating=Catalog, Temp Coeff(Max)(ppm/ degree C)=100, Temp Coeff(Typ)(ppm/ degree C)=15, AEC Category=Q200, AEC Qualified=N, Code_JEDEC=MO-203, ComponentLink1Description="Datasheet Link", ComponentLink1URL=http://www.ti.com/lit/ds/symlink/lm4040.pdf, ComponentLink2Description="Product Folder", ComponentLink2URL=http://www.ti.com/product/lm4040, ComponentLink3Description="Online Datasheet", ComponentLink3URL=http://www.ti.com/product/lm4040/datasheet, CompType=IC, DatasheetVersion=SLOS456K, Eco-Plan="Green (RoHS & no Sb/Br)", Initial Accuracy @ 25/deg C(%)=0.5, Iout/Iz(Max)(mA)=15, Min Iz for Regulation(uA)=75, MountType=SMT, PackageDescription=SOT-SC70-5, PackageReference=DCK0005A, PartId=1, PartNumber=LM4040C25IDCKR, RoHS=Y, SizeArea_mm2=4.2, SizeAreaWB_mm2=9.3, SizeX_mm=2.1, SizeY_mm=2.0, SizeZ_mm=1.1, SubFamily="Shunt Voltage Reference", VO(V)=2.5
J1/J3: library part CMP-0003837-4, "Receptacle, 2.54mm, 10x2, Tin, TH", Alternate Manufacturer="Major League Electronics", Alternate PartNumber=CRD-081413-A-G, Manufacturer=Samtec, Supplier Part Number 1=SAM1204-10-ND, ComponentLink1Description="Datasheet Link", ComponentLink1URL=https://www.samtec.com/ftppub/cpdf/SSQ-1XX-XX-XXX-X-XX-XXX-XX-X-MKT.pdf, CompType=Receptacle, Green_EU RoHS=Passed, Green_EU RoHS-2=Passed, Green_Lifecycle=Active, Green_REACh=Incomplete, MountType=TH, Note="Booster Pack 40 pin J1 and J3", PackageReference="10x2 Receptacle", PartNumber=SSQ-110-03-T-D, RoHS=Y, Supplier 1=Digi-Key, Supplier 2=Newark, Supplier Part Number 2=11P8392
J2/J4: library part CMP-0078266-4, "Receptacle, 2.54mm, 10x2, Tin, TH", Alternate Manufacturer="Major League Electronics", Alternate PartNumber=CRD-081413-A-G, Manufacturer=Samtec, Supplier Part Number 1=SAM1204-10-ND, ComponentLink1Description="Datasheet Link", ComponentLink1URL=https://www.samtec.com/ftppub/cpdf/SSQ-1XX-XX-XXX-X-XX-XXX-XX-X-MKT.pdf, CompType=Receptacle, Green_EU RoHS=Passed, Green_EU RoHS-2=Passed, Green_Lifecycle=Active, Green_REACh=Incomplete, MountType=TH, Note="Booster Pack 40 pin J2 and J4", PackageReference="10x2 Receptacle", PartNumber=SSQ-110-03-T-D, RoHS=Y, Supplier 1=Digi-Key, Supplier 2=Newark, Supplier Part Number 2=11P8392
J4 J5 J6 J7 J8 J13 J16 J17 J18 J23 J24 J25: library part CMP-0055312-1, "Header, 100mil, 2x1, Tin, TH", Manufacturer=Molex, Supplier Part Number 1=WM8072-ND, ClassName=Header, CNHeader=TRUE, ComponentLink1Description="Datasheet URL", ComponentLink1URL=http://www.molex.com/pdm_docs/sd/901200122_sd.pdf, CompType=Header, CT=FALSE, Green_EU RoHS=Passed, Green_EU RoHS-2=Passed, Green_Lifecycle=Active, Green_REACh=Passed, LatestRevisionDate=26/05/2017, MountType=TH, PackageReference="Header 2x1", PartNumber=90120-0122, Publisher="Texas Instruments", RoHS=Y, Supplier 1=Digi-Key, Supplier 2=Newark, Supplier 3=Mouser, Supplier Part Number 2=19M8215, Supplier Part Number 3=538-90120-0122
J9 J10 J11 J14 J15 J19 J20 J21 J22: library part CMP-0002338-1, "Header, 100mil, 3x1, Tin, TH", Color=Black, Current_A=3A, Manufacturer="Sullins Connector Solutions", Supplier Part Number 1=S1012E-03-ND, Voltage_V=1.8kV, Cert_UL=Y, ClassName=Header, CNHeader=TRUE, ComponentLink1Description="Datasheet URL", ComponentLink1URL=http://www.sullinscorp.com/catalogs/77_PAGE108-109_.100_MALE_HDR.pdf, CompType=Header, ContactFinish=Tin, CT=FALSE, Gender=Male, Green_EU RoHS=Incomplete, Green_EU RoHS-2=Incomplete, Green_Lifecycle="Not Set", Green_REACh=Incomplete, LatestRevisionDate=26/05/2017, MountType=TH, Orientation=Vertical, PackageReference="Header, 3 PIN, 100mil, Tin", PartNumber=PEC03SAAN, PinCount=3, Pitch_mm=2.54, Publisher="Texas Instruments", RoHS=Y, Row_Count=1, Shrouded=N, Supplier 1=Digi-Key
J12: library part CMP-0075485-1, "Header, 100mil, 5x1, Gold, TH", Manufacturer=Samtec, Supplier Part Number 1=SAM8737-ND, ClassName=Header, CNHeader=True, ComponentLink1Description="Datasheet URL", ComponentLink1URL=http://www.samtec.com/ftppub/pdf/TSW_TH.PDF, CompType=Header, CT=False, Green_EU RoHS=Passed, Green_EU RoHS-2=Passed, Green_Lifecycle=Active, Green_REACh=Passed, LatestRevisionDate=2017-07-12, MountType=TH, PackageReference="Header, 100mil, 5x1, TH", PartNumber=HTSW-105-07-G-S, Publisher="Texas Instruments", RoHS=Y, Supplier 1=Digi-Key, Supplier 2=Newark, Supplier 3=Farnell, Supplier Part Number 2=60R3871, Supplier Part Number 3=1926325
J26: library part CMP-0054565-2, "Header, 100mil, 3x2, Gold, TH", Color=Black, Current_A=3A, Manufacturer="Sullins Connector Solutions", Supplier Part Number 1=S2011E-03-ND, Voltage_V=1.8kV, Cert_UL=Y, ClassName=Header, ComponentLink1Description="Datasheet URL", ComponentLink1URL=http://www.sullinscorp.com/catalogs/77_PAGE108-109_.100_MALE_HDR.pdf, CompType=Header, ContactFinish=Gold, Gender=Male, Green_EU RoHS=Passed, Green_EU RoHS-2=Passed, Green_Lifecycle=Active, Green_REACh=Passed, MountType=TH, Orientation=Vertical, PackageReference="Sullins 100mil, 2x3, 230 mil above insulator", PartNumber=PBC03DAAN, PinCount=6, Pitch_mm=2.54, RoHS=Y, Row_Count=2, RowSpacing_mm=2.54, Shrouded=N, Supplier 1=Digi-Key
J27 J28: library part CMP-0054806-2, "Header, 2.54 mm, 5x2, Gold, TH", Current_A=3A, Manufacturer="Wurth Elektronik", Supplier Part Number 1=732-2672-ND, Voltage_V=250V, Cert_UL=Y, ClassName=Header, ComponentLink1Description="Datasheet URL", ComponentLink1URL=http://katalog.we-online.de/em/datasheet/6130xx21121.pdf, CompType=Header, ContactFinish=Gold, Gender=Male, Green_EU RoHS=Passed, Green_EU RoHS-2=Incomplete, Green_Lifecycle=Active, Green_REACh=Passed, MountType=TH, Orientation=Vertical, PackageReference="Header, 2.54mm, 5x2, TH", PartNumber=61301021121, PinCount=10, Pitch_mm=2.54, RoHS=Y, Row_Count=2, RowSpacing_mm=2.54, Shrouded=N, Supplier 1=Digi-Key, Supplier 2=Newark, Supplier 3=Mouser, Supplier Part Number 2=16T0631, Supplier Part Number 3=710-61301021121
J101: library part CMP-0054622-1, "Header, 2.54mm, 9x2, Tin, TH", Color=Black, Current_A=3A, Manufacturer="Sullins Connector Solutions", Supplier Part Number 1=S2012E-09-ND, Cert_UL=Y, ClassName=Header, CNHeader=TRUE, ComponentLink1Description="Datasheet URL", ComponentLink1URL=http://www.sullinscorp.com/catalogs/77_PAGE108-109_.100_MALE_HDR.pdf, CompType=Header, ContactFinish=Tin, CT=FALSE, Gender=Male, LatestRevisionDate=26/05/2017, MountType=TH, Orientation=Vertical, PackageReference="Header, 2.54mm, 9x2, TH", PartNumber=PEC09DAAN, PinCount=18, Pitch_mm=2.54, Publisher="Texas Instruments", RoHS=Y, Row_Count=2, RowSpacing_mm=2.54, Shrouded=N, Supplier 1=Digi-Key
J102 J103: library part CMP-0075634-1, "Header(Shrouded), 1.27mm, 5x2, Gold, SMT", Color=Black, Current_A=3.3A, Manufacturer=Samtec, Supplier Part Number 1=SAM8799-ND, Cert_CSA=Y, Cert_UL=Y, CNHeader=False, ComponentLink1Description="Datasheet URL", ComponentLink1URL=http://suddendocs.samtec.com/prints/ftsh-1xx-xx-xxx-dv-xxx-mkt.pdf, CompType=Header, ContactFinish=Gold, CT=False, Gender=Male, LatestRevisionDate=2017-07-12, MountType=SMT, Orientation=Vertical, PackageReference="Header(Shrouded), 1.27mm, 5x2, SMT", PartNumber=FTSH-105-01-L-DV-K, PinCount=10, Pitch_mm=1.27, Publisher="Texas Instruments", RoHS=Y, Row_Count=2, RowSpacing_mm=1.27, Shrouded=Y, Supplier 1=Digi-Key, Supplier 2=Farnell, Supplier Part Number 2=1872577
L1: library part CMP-0059590-1, "Inductor, Wirewound, Ceramic, 2.2 uH, 0.89 A, 0.13 ohm, SMD", Manufacturer="Taiyo Yuden", Supplier Part Number 1=587-1618-1-ND, Value1="0.13 ohm", Value2=0.89A, ValueDisplayed=2.2uH, AEC Category=Q200, AEC Grade=N/A, AEC Qualified=N, ComponentLink1Description="Datasheet link", ComponentLink1URL=http://www.yuden.co.jp/productdata/catalog/en/wound02_e.pdf, CompType=Inductor, DCR_ohm=0.13, Green_EU RoHS=Passed, Green_EU RoHS-2=Passed, Green_Lifecycle=Active, Green_REACh=Passed, Imax_A=890mA, Ind_H=2.2µH, Irms="1.1A @ 40C rise", Isat="0.89A @ 30% inductance drop", LatestRevisionDate=2017-06-02, Material=Ceramic, MountType=SMT, PackageReference=2.5x1.8x1.8mm, PartNumber=CBC2518T2R2M, Published=2008-06-26, Publisher="Texas Instruments", RoHS=Y, SizeArea_mm2=4.5, SizeAreaWB_mm2=9.8, SizeX_mm=2.5, SizeY_mm=1.8, SizeZ_mm=1.8, Supplier 1=Digi-Key, Supplier 2=Newark, Supplier 3=Mouser, Supplier Part Number 2=18J0834, Supplier Part Number 3=963-CBC2518T2R2M, Technology=Wirewound
LED1 LED101: library part CMP-0002972-3, "LED, Red, SMD", Color=Red, Manufacturer="Stanley Electric Co., LTD", Power_TotalModule=57.5mW, Value1=0.0575W, Value2=1.7V, ComponentLink1Description="Datasheet link", ComponentLink1URL=https://sps06.itg.ti.com/sites/KMS/crossdivteams/altium/docs/ComponentDatasheets/BR1111C-TR.pdf, CompType=LED, Io_A=20mA, Ir_A=100µA, MountType=SMT, PackageReference=1.6x0.8mm, PartNumber=BR1111C-TR, RoHS=Y, TJmax_C=85°C, Type=?, Vf_V=1.7V, Vr_V=4V
LED2: library part CMP-0074720-1, "LED, RGB, SMD", Color=RGB, Manufacturer=Everlight, Supplier Part Number 1=19-337/R6GHBHC-A01/2T-ND, Value1=W, Value2=3.8V, Angle=120.0, ComponentLink1Description="Datasheet link", ComponentLink1URL=http://www.everlight.com/file/ProductFile/19-337-R6GHBHC-A01-2T.pdf, CompType=LED, Io_A=25mA, Ir_A=50µA, LatestRevisionDate=2017-06-26, MountType=SMT, PackageReference=1.6x1.6mm, PartNumber=19-337/R6GHBHC-A01/2T, Published=2008-07-11, Publisher="Texas Instruments", RoHS=Y, Supplier 1=Digi-Key, Supplier 2=Mouser, Supplier Part Number 2=638-19337R6GHBHCA01T, TJmax_C=85°C, Type=?, U/M=EA, Vf_V=3.8V, Vr_V=5V
LED102: library part CMP-0002827-3, "LED, Green, SMD", Color=green, Manufacturer=Lite-On, Power_TotalModule=100mW, Value1=0.1W, Value2=2.1V, ComponentLink1Description="Datasheet link", ComponentLink1URL=https://sps06.itg.ti.com/sites/KMS/crossdivteams/altium/docs/ComponentDatasheets/LTST-C190GKT.pdf, CompType=LED, Io_A=20mA, MountType=SMT, PackageReference=1.6x0.8x0.8mm, PartNumber=LTST-C190GKT, RoHS=Y, Type=?, Vf_V=2.1V
LOGO1: library part CMP-0074844-1, LatestRevisionDate=2017-07-06, Lib Reference="CE Mark", PartNumber="CE Mark", Published=2009-03-03, Publisher="Texas Instruments", SymbolCreator=a0412235
Logo2 Logo3: library part CMP-0074838-1, "Texas Instrument Corporate Signature", ClassName=Logo, LatestRevisionDate=2017-07-06, Lib Reference=TI_Logo, PartNumber="Texas Instruments", Published=2009-03-03, Publisher="Texas Instruments", SymbolCreator=a0412235, SymbolVersion=2011-08-22
Logo4: library part CMP-0074840-1, "ESD Susceptible Symbol", LatestRevisionDate=2017-07-06, Lib Reference=ESD_Susceptible, PartNumber="ESD Susceptible", Published=2009-03-03, Publisher="Texas Instruments", SymbolCreator=a0412235, SymbolVersion=2011-08-22
Logo6: library part CMP-0074847-1, "FCC_disclaimer", LatestRevisionDate=2017-07-06, Lib Reference=FCC_disclaimer, PartNumber="FCC disclaimer", Published=2009-03-03, Publisher="Texas Instruments"
Logo7: library part CMP-0074769-1, Lib Reference="WEEE logo", PartNumber="WEEE logo"
MH1 MH2 MH3 MH4: library part CMP-0078424-2, "PCB Mounting Hole, No Pad", Manufacturer=Any, PartNumber=N/A, CompType="Mounting Hole", Key="Mounting Hole (non-standard) No Pad", MountType=N/A, PackageReference="Mounting Hole"
MSP1: library part CMP-0093960-1, "Mixed-Signal Microcontrollers With CAN-FD Interface LQFP64", Frequency_Fixed=80MHz, Manufacturer="Texas Instruments", Max Supply Voltage=3.6V, Min Supply Voltage=1.62V, Operating Temperature Range="-40°C to +125°C", AEC Qualified=No, Core Architecture="ARM Cortex-M0+", Data Bus Width=32bits, Datasheet Path=datasheets/IC-MSPM0G3507SPM.pdf, helpURL=https://upverter.com/upn/revision/bc7c7c23c86c8513/, Interface=I2C,SPI,UART,CAN,LIN,IrDA,SMBus, Memory Size=128KBytes, Memory Type=FLASH, Number Of A/D Converters=2, Number Of Adc Channels=16, Number Of Cores=1, Number Of I2C Channels=2, Number Of I/Os=60, Number Of Pwm Channels=14, Number Of Spi Channels=2, Number Of Timers/Counters=7, Number Of Uart Channels=4, PackageReference=LQFP64, Part Number=MSPM0G3507SPM, PartNumber=MSPM0G3507SPM, Ram Size=32KBytes, RoHS=UNKNOWN, SizeZ_mm=1.6mm, Standoff Height=0.05mm, TaMax_C=+125°C, TaMin_C=-40°C, TJmax_C=+130°C
P1: library part CMP-0054990-1, "SMA Straight PCB Socket Die Cast, 50 Ohm, TH", Manufacturer="TE Connectivity", Supplier Part Number 1=A97594-ND, ValueDisplayed=DNC, CNHeader=FALSE, ComponentLink1Description="Datasheet URL", ComponentLink1URL=http://www.te.com/commerce/DocumentDelivery/DDEController?Action=srchrtrv&DocNm=1814832&DocType=Customer+Drawing&DocLang=English, CompType=SMA, CT=TRUE, Green_EU RoHS="Passed with Exemption", Green_EU RoHS-2=Incomplete, Green_Lifecycle=Active, Green_REACh=Passed, LatestRevisionDate=26/05/2017, MountType=TH, PackageReference="SMA Straight PCB Socket Die Cast, TH", PartNumber=5-1814832-1, Publisher="Texas Instruments", RoHS=Y, Supplier 1=Digi-Key, Supplier 2=Newark, Supplier 3=Mouser, Supplier Part Number 2=78M7270, Supplier Part Number 3=571-5-1814832-1
R1: library part CMP-0022292-1, "RES, 2.37 M, 1%, 0.1 W, 0603", Manufacturer=Vishay-Dale, Power_W=100mW, Supplier Part Number 1=541-2.37MHCT-ND, TempCo="100 ppm/C", Tolerance_%=1%, Value2=0.1W, Value_Code=2M37, ValueDisplayed=2.37M, AEC Category=Q200, AEC Qualified=?, ComponentLink1Description="Datasheet link", ComponentLink1URL=http://www.vishay.com/docs/20035/dcrcwe3.pdf, CompType=Resistor, EIA_Code=E96, LatestRevisionDate=2017-03-09, MountType=SMT, PackageReference=0603, PartNumber=CRCW06032M37FKEA, Published=2008-06-26, Publisher="Texas Instruments", Res_ohm=2.37M, RoHS=Y, SizeArea_mm2=1.28, SizeX_mm=1.6, SizeY_mm=0.8, SizeZ_mm=1, Supplier 1=Digi-Key, Supplier 2=Mouser, Supplier Part Number 2=71-CRCW06032M37FKEA, Technology="Thick Film", U/M=EA, Value1=1%, VDC_V=75V
R2 R14: library part CMP-0026935-1, "RES, 47 k, 5%, 0.063 W, 0402", Manufacturer=Vishay-Dale, Power_W=63mW, Supplier Part Number 1=541-47KJCT-ND, TempCo="200 ppm/C", Tolerance_%=5%, Value2=0.063W, Value_Code=47k0, ValueDisplayed=47k, AEC Category=Q200, AEC Qualified=?, ComponentLink1Description="Datasheet link", ComponentLink1URL=http://www.vishay.com/docs/20035/dcrcwe3.pdf, CompType=Resistor, EIA_Code=E24, LatestRevisionDate=2017-03-09, MountType=SMT, PackageReference=0402, PartNumber=CRCW040247K0JNED, Published=2008-06-26, Publisher="Texas Instruments", Res_ohm=47k, RoHS=Y, SizeArea_mm2=0.5, SizeX_mm=1, SizeY_mm=0.5, SizeZ_mm=0.6, Supplier 1=Digi-Key, Supplier 2=Newark, Supplier 3=Mouser, Supplier Part Number 2=52K7099, Supplier Part Number 3=71-CRCW0402-J-47K-E3, Technology="Thick Film", U/M=EA, Value1=5%, VDC_V=50V
R3 R61 R66 R67 R68 R70 R74: library part CMP-0025885-5, "RES, 0, 5%, 0.1 W, 0603", Manufacturer=Yageo, Power_W=100mW, Supplier Part Number 1=311-0.0GRCT-ND, TempCo="200 ppm/C", Tolerance_%=5%, Value2=0.1W, Value_Code=0000, ValueDisplayed=DNC, AEC Category=Q200, AEC Grade=N/A, AEC Qualified=N, ComponentLink1Description="Datasheet link", ComponentLink1URL=http://www.yageo.com/pdf/Pu-RC0603_51_PbFree_L_2.pdf, CompType=Resistor, EIA_Code=E24, MountType=SMT, PackageReference=0603, PartNumber=RC0603JR-070RL, Res_ohm=0, RoHS=Y, SizeArea_mm2=1.28, SizeAreaWB_mm2=4.68, SizeX_mm=1.6, SizeY_mm=0.8, SizeZ_mm=1, Supplier 1=Digi-Key, Supplier 2=Mouser, Supplier 3=Farnell, Supplier Part Number 2=603-RC0603JR-070RL, Supplier Part Number 3=9233130, Technology="Thick Film", Value1=5%, VDC_V=75V
R4 R29 R30: library part CMP-0026934-2, "RES, 470, 5%, 0.063 W, 0402", Manufacturer=Vishay-Dale, Power_W=63mW, Supplier Part Number 1=541-470JCT-ND, TempCo="200 ppm/C", Tolerance_%=5%, Value2=0.063W, Value_Code=470R, ValueDisplayed=470, AEC Category=Q200, AEC Qualified=?, ComponentLink1Description="Datasheet link", ComponentLink1URL=http://www.vishay.com/docs/20035/dcrcwe3.pdf, CompType=Resistor, EIA_Code=E24, LatestRevisionDate=2017-03-09, MountType=SMT, PackageReference=0402, PartNumber=CRCW0402470RJNED, Published=2008-06-26, Publisher="Texas Instruments", Res_ohm=470, RoHS=Y, SizeArea_mm2=0.5, SizeX_mm=1, SizeY_mm=0.5, SizeZ_mm=0.6, Supplier 1=Digi-Key, Supplier 2=Newark, Supplier 3=Mouser, Supplier Part Number 2=59M6737, Supplier Part Number 3=71-CRCW0402J-470-E3, Technology="Thick Film", U/M=EA, Value1=5%, VDC_V=50V
R5: library part CMP-0026878-1, "RES, 220, 5%, 0.063 W, 0402", Manufacturer=Vishay-Dale, Power_W=63mW, Supplier Part Number 1=541-220JCT-ND, TempCo="200 ppm/C", Tolerance_%=5%, Value2=0.063W, Value_Code=220R, ValueDisplayed=220, AEC Category=Q200, AEC Qualified=?, ComponentLink1Description="Datasheet link", ComponentLink1URL=http://www.vishay.com/docs/20035/dcrcwe3.pdf, CompType=Resistor, EIA_Code=E24, LatestRevisionDate=2017-03-09, MountType=SMT, PackageReference=0402, PartNumber=CRCW0402220RJNED, Published=2008-06-26, Publisher="Texas Instruments", Res_ohm=220, RoHS=Y, SizeArea_mm2=0.5, SizeX_mm=1, SizeY_mm=0.5, SizeZ_mm=0.6, Supplier 1=Digi-Key, Supplier 2=Newark, Supplier 3=Mouser, Supplier Part Number 2=59M6718, Supplier Part Number 3=71-CRCW0402J-220-E3, Technology="Thick Film", U/M=EA, Value1=5%, VDC_V=50V
R6 R7: library part CMP-0026906-1, "RES, 330, 5%, 0.063 W, 0402", Manufacturer=Vishay-Dale, Power_W=63mW, Supplier Part Number 1=541-330JCT-ND, TempCo="200 ppm/C", Tolerance_%=5%, Value2=0.063W, Value_Code=330R, ValueDisplayed=330, AEC Category=Q200, AEC Qualified=?, ComponentLink1Description="Datasheet link", ComponentLink1URL=http://www.vishay.com/docs/20035/dcrcwe3.pdf, CompType=Resistor, EIA_Code=E24, LatestRevisionDate=2017-03-09, MountType=SMT, PackageReference=0402, PartNumber=CRCW0402330RJNED, Published=2008-06-26, Publisher="Texas Instruments", Res_ohm=330, RoHS=Y, SizeArea_mm2=0.5, SizeX_mm=1, SizeY_mm=0.5, SizeZ_mm=0.6, Supplier 1=Digi-Key, Supplier 2=Newark, Supplier 3=Mouser, Supplier Part Number 2=59M6728, Supplier Part Number 3=71-CRCW0402J-330-E3, Technology="Thick Film", U/M=EA, Value1=5%, VDC_V=50V
R8: library part CMP-0088648-1, "Res Thin Film 0402 100K Ohm 0.1% 1/16W ±25ppm/°C Molded SMD SMD Punched Carrier T/R", Digikey Part Number=P100KDCCT-ND, Manufacturer=Panasonic, Mouser Part Number=667-ERA-2AEB104X, Octopart Part Number=aea26725a1f47165, Operating Temperature Range="-55°C to +155°C", Power_W=63mW, TempCo=25ppm/°C, Tolerance_%=0.1%, Voltage=25V, AEC Grade="Grade 0", AEC Qualified=Yes, Category 5A00970A6D5C81C7=Uncategorized, Category 5C6A91606D4187Ad=Resistors, Category 7542B8484461Ae85="Passive Components", Category Cd01000Bfc2916C6="Single Components", ComponentLink1Description=Datasheet, ComponentLink1URL=https://industrial.panasonic.com/cdbs/www-data/pdf/RDM0000/AOA0000C307.pdf, datasheet=https://industrial.panasonic.com/cdbs/www-data/pdf/RDM0000/AOA0000C307.pdf, Datasheet Path=datasheets/Res-ERA-2AEB104X.pdf, Digikey Description="RES SMD 100K OHM 0.1% 1/16W 0402", helpURL=https://upverter.com/upn/revision/e235bfb49dac4d4c/, Lead Free=Yes, Mouser Description="Res Thin Film 0402 100K Ohm 0.1% 0.063W ±25ppm/°C Molded SMD Punched Carrier T/R", PackageReference=0402, Part Number=ERA-2AEB104X, PartNumber=ERA-2AEB104X, Res_ohm=100k, RoHS=TRUE, Series=ERA, SizeZ_mm=0.4mm, Supplier 1=Digikey, Supplier 2=Mouser, Supplier Part Number 1=P100KDCCT-ND, Supplier Part Number 2=667-ERA-2AEB104X, Technology="Thin Film", VDC_V=50V
R9 R10 R11 R15 R17 R20 R22: library part CMP-0027004-2, "RES, 0, 5%, 0.063 W, 0402", Manufacturer="Yageo America", Power_W=63mW, Supplier Part Number 1=311-0.0JRCT-ND, TempCo="200 ppm/C", Tolerance_%=5%, Value2=0.063W, Value_Code=0000, ValueDisplayed=DNC, AEC Category=Q200, AEC Qualified=?, ComponentLink1Description="Datasheet link", ComponentLink1URL=http://www.yageo.com/pdf/Pu-RC0402_51_PbFree_L_2.pdf, CompType=Resistor, EIA_Code=E24, LatestRevisionDate=2017-03-09, MountType=SMT, PackageReference=0402, PartNumber=RC0402JR-070RL, Published=2008-06-26, Publisher="Texas Instruments", Res_ohm=0, RoHS=Y, SizeArea_mm2=0.5, SizeX_mm=1, SizeY_mm=0.5, SizeZ_mm=0.6, Supplier 1=Digi-Key, Supplier 2=Mouser, Supplier 3=Farnell, Supplier Part Number 2=603-RC0402JR-070RL, Supplier Part Number 3=9232516, Technology="Thick Film", U/M=EA, Value1=5%, VDC_V=50V
R12 R16: library part CMP-0025927-5, "RES, 4.7 k, 5%, 0.1 W, 0603", Manufacturer=Yageo, Power_W=100mW, Supplier Part Number 1=311-4.7KGRCT-ND, TempCo="100 ppm/C", Tolerance_%=5%, Value2=0.1W, Value_Code=4k70, ValueDisplayed=4.7k, AEC Category=Q200, AEC Grade=N/A, AEC Qualified=N, ComponentLink1Description="Datasheet link", ComponentLink1URL=http://www.yageo.com/pdf/Pu-RC0603_51_PbFree_L_2.pdf, CompType=Resistor, EIA_Code=E24, MountType=SMT, PackageReference=0603, PartNumber=RC0603JR-074K7L, Res_ohm=4.7k, RoHS=Y, SizeArea_mm2=1.28, SizeAreaWB_mm2=4.68, SizeX_mm=1.6, SizeY_mm=0.8, SizeZ_mm=1, Supplier 1=Digi-Key, Supplier 2=Mouser, Supplier 3=Farnell, Supplier Part Number 2=603-RC0603JR-074K7L, Supplier Part Number 3=9233466, Technology="Thick Film", Value1=5%, VDC_V=75V
R13 R19: library part CMP-0026886-1, "RES, 270, 5%, 0.063 W, 0402", Manufacturer=Vishay-Dale, Power_W=63mW, Supplier Part Number 1=541-270JCT-ND, TempCo="200 ppm/C", Tolerance_%=5%, Value2=0.063W, Value_Code=270R, ValueDisplayed=270, AEC Category=Q200, AEC Qualified=?, ComponentLink1Description="Datasheet link", ComponentLink1URL=http://www.vishay.com/docs/20035/dcrcwe3.pdf, CompType=Resistor, EIA_Code=E24, LatestRevisionDate=2017-03-09, MountType=SMT, PackageReference=0402, PartNumber=CRCW0402270RJNED, Published=2008-06-26, Publisher="Texas Instruments", Res_ohm=270, RoHS=Y, SizeArea_mm2=0.5, SizeX_mm=1, SizeY_mm=0.5, SizeZ_mm=0.6, Supplier 1=Digi-Key, Supplier 2=Newark, Supplier 3=Mouser, Supplier Part Number 2=59M6722, Supplier Part Number 3=71-CRCW0402J-270-E3, Technology="Thick Film", U/M=EA, Value1=5%, VDC_V=50V
R18 R21: library part CMP-0025906-5, "RES, 2.2 k, 5%, 0.1 W, 0603", Manufacturer=Yageo, PartNumber=RC0603JR-072K2L, Power_W=100mW, Supplier Part Number 1=311-2.2KGRCT-ND, TempCo="100 ppm/C", Tolerance_%=5%, Value2=0.1W, Value_Code=2k20, ValueDisplayed=2.2k, AEC Category=Q200, AEC Grade=N/A, AEC Qualified=N, ComponentLink1Description="Datasheet link", ComponentLink1URL=http://www.yageo.com/pdf/Pu-RC0603_51_PbFree_L_2.pdf, CompType=Resistor, EIA_Code=E24, MountType=SMT, PackageReference=0603, Res_ohm=2.2k, RoHS=Y, SizeArea_mm2=1.28, SizeAreaWB_mm2=4.68, SizeX_mm=1.6, SizeY_mm=0.8, SizeZ_mm=1, Supplier 1=Digi-Key, Supplier 2=Mouser, Supplier 3=Farnell, Supplier Part Number 2=603-RC0603JR-072K2L, Supplier Part Number 3=9233423, Technology="Thick Film", Value1=5%, VDC_V=75V
R23: library part CMP-0027004-2, "RES, 0, 5%, 0.063 W, 0402", Manufacturer="Yageo America", Power_W=63mW, Supplier Part Number 1=311-0.0JRCT-ND, TempCo="200 ppm/C", Tolerance_%=5%, Value2=0.063W, Value_Code=0000, AEC Category=Q200, AEC Qualified=?, ComponentLink1Description="Datasheet link", ComponentLink1URL=http://www.yageo.com/pdf/Pu-RC0402_51_PbFree_L_2.pdf, CompType=Resistor, EIA_Code=E24, LatestRevisionDate=2017-03-09, MountType=SMT, PackageReference=0402, PartNumber=RC0402JR-070RL, Published=2008-06-26, Publisher="Texas Instruments", Res_ohm=0, RoHS=Y, SizeArea_mm2=0.5, SizeX_mm=1, SizeY_mm=0.5, SizeZ_mm=0.6, Supplier 1=Digi-Key, Supplier 2=Mouser, Supplier 3=Farnell, Supplier Part Number 2=603-RC0402JR-070RL, Supplier Part Number 3=9232516, Technology="Thick Film", U/M=EA, Value1=5%, VDC_V=50V